# Altium PCB 555PCB.PcbDoc
Units mil, origin at the board's own origin, x right, y up, seen from the top; angles counter-clockwise.
Board outline 1795 x 845 mil, 2 copper layers (Top Layer, Bottom Layer); 12 components, 7 nets, 26 pads, 0 vias.
Unrouted connection lines stored in the file: 15.
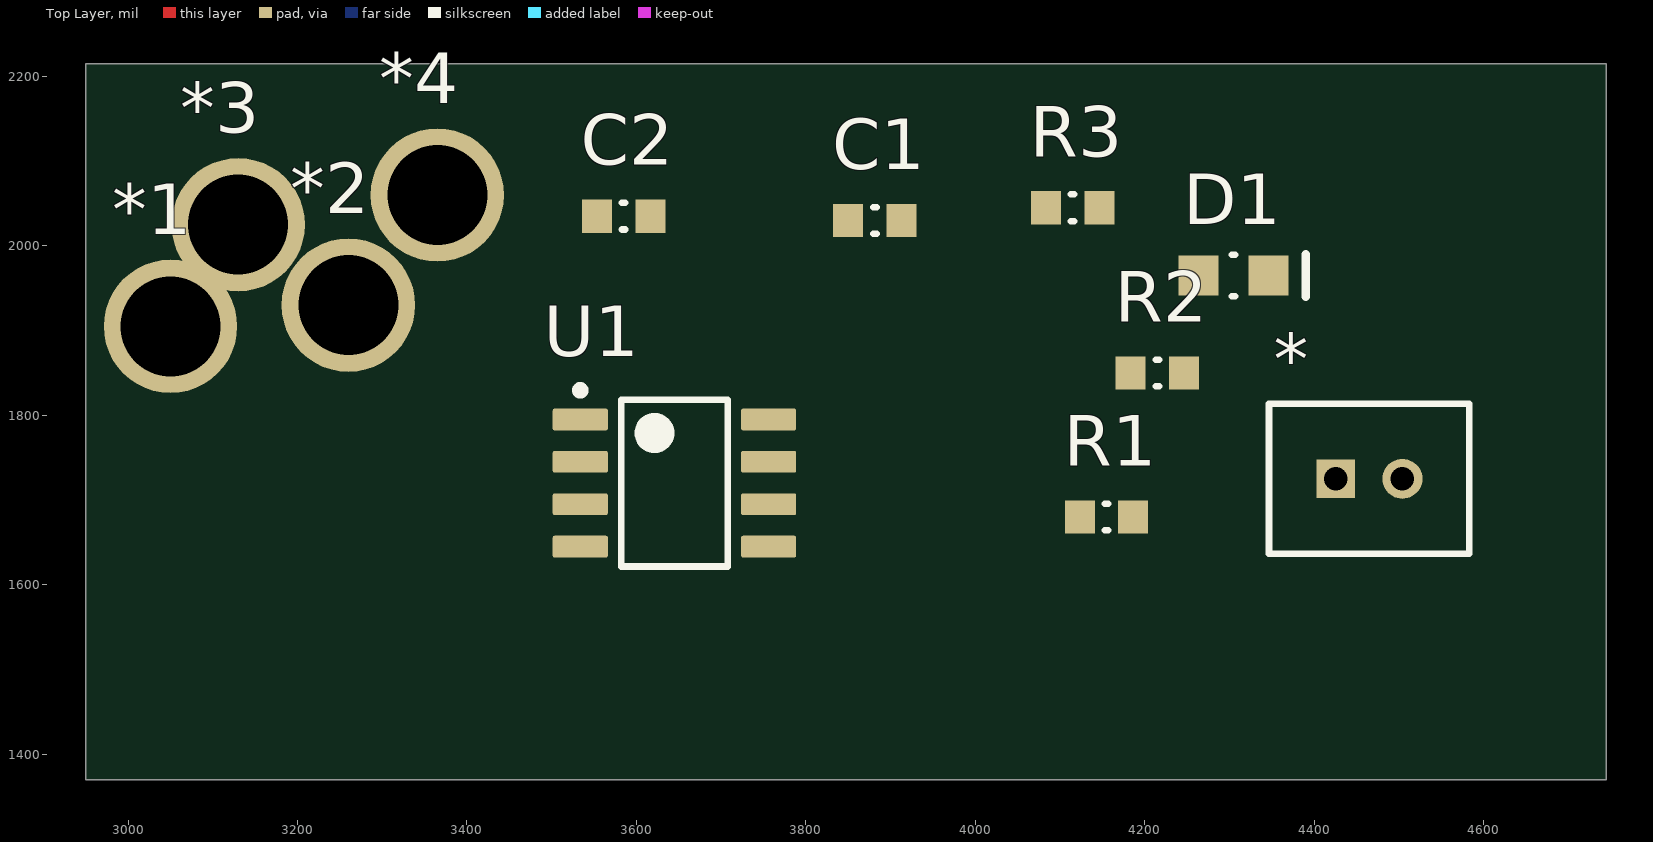
[diagram p0: Top Layer view]
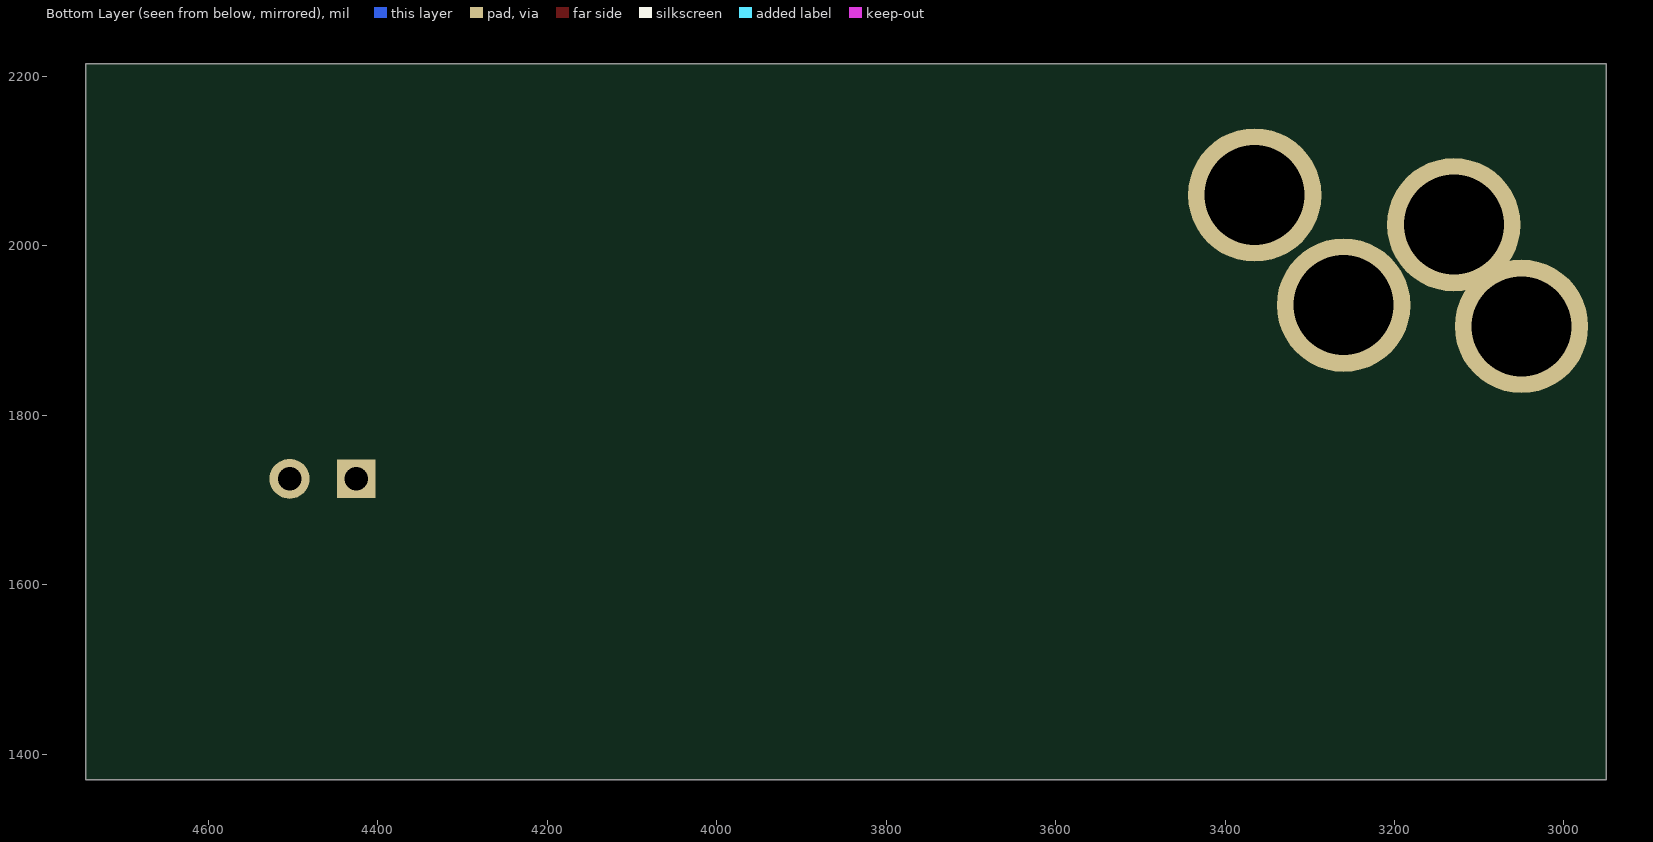
[diagram p1: Bottom Layer view, seen from below]

## Layer stack, top to bottom
Top Solder: solder mask 0.4, Solder Resist, Dk 3.5
Top Layer: signal copper 1.4
Dielectric 1: dielectric 12.6, FR-4, Dk 4.8
Bottom Layer: signal copper 1.4
Bottom Solder: solder mask 0.4, Solder Resist, Dk 3.5

## Board outline
2950,1370 4745,1370 4745,2215 2950,2215

## Design rules (kind name [scope] priority, off if disabled: settings)
Clearance [All] p1: gap=10 ignorepadtopadclearanceinfootprint=FALSE except(0: Arc-Hole Track-Hole SMDPad-Hole THPad-Hole Via-Hole Fill-Hole Poly-Hole Region-Hole Text-Hole)
PolygonConnect [All] p1: connectstyle=Relief reliefconductorwidth=10 reliefentries=4 polygonreliefangle="90 Angle" airgapwidth=10
RoutingVias [All] p1: holewidth=28 width=50 viastyle="Through Hole" minholewidth=28 minwidth=50 maxholewidth=28 maxwidth=50
SolderMaskExpansion [All] p1: expansion=4
Width [All] p1: maxlimit=10 minlimit=10 preferedwidth=10
30 further rules are at their usual default settings.

## Components (designator, comment, footprint, x,y, rotation, side; value= is the part's Value field where it differs from the comment)
* "CON_2M" JST-B2B-PHSK 4465,1725 r0 top
*1 "MOUNTING_HOLES" MOUNTING_HOLE 3050,1905 r0 top
*2 "MOUNTING_HOLES" MOUNTING_HOLE 3260,1930 r0 top
*3 "MOUNTING_HOLES" MOUNTING_HOLE 3130,2025 r0 top
*4 "MOUNTING_HOLES" MOUNTING_HOLE 3365,2060 r0 top
C1 "10uF" CAPC0603(1608)55_N 3881.5,2030 r0 top
C2 "CAP_10nF_0603" CAPC0603(1608)55_N 3585,2035 r0 top value=10nF
D1 "DIO_LED_R" LED_0805_LINE 4305,1965 r0 top
R1 "RES_1K_0603" RESC0603(1608)_N 4155,1680 r0 top value=1K
R2 "RES_10K_0603" RESC0603(1608)_N 4215,1850 r0 top value=10K
R3 "RES_1K_0603" RESC0603(1608)_N 4115,2045 r0 top value=1K
U1 "NE555D" 8-SOIC_M 3645,1720 r0 top

## Footprints (in the part's own frame and the unit in brackets; to place one, negate y for a bottom-side part, rotate by r counter-clockwise, add the part's x,y. Pads: shape width x height; smd on the part's side, far side on the other; paste and mask are expansions set on the pad)
8-SOIC_M [mm] "SOIC, 8-Leads, Body 5x4mm, Pitch 1.27mm, IPC Low Density"
  rrect15% 1.65x0.65 smd: 1(-2.825,1.905) 2(-2.825,0.635) 3(-2.825,-0.635) 4(-2.825,-1.905) 5(2.825,-1.905) 6(2.825,-0.635) 7(2.825,0.635) 8(2.825,1.905)
  silkscreen extent -2.95,-2.5 1.6,2.9, body extent -3,-2.45 3,2.45, height 1.63
CAPC0603(1608)55_N [mm] "Chip Capacitor, Body 1.6x0.8mm, Height 0.55mm, IPC Medium Density"
  rect 0.9x1 smd: 1(-0.8,0) 2(0.8,0)
  silkscreen extent -0.05,-0.4 0.05,0.4, body extent -0.87,-0.48 0.88,0.47, height 0.55
JST-B2B-PHSK [mm]
  rect 1.162x1.162 / inner rect 1.524x1.524 / far side rect 1.162x1.162 hole 0.7: 1(-1,0)
  round 1.2 / inner round 1.524 / far side round 1.2 hole 0.7: 2(1,0)
  silkscreen extent -3,-2.25 3,2.25
LED_0805_LINE [mm] "SMD, 2-Leads, Body 2x1.25mm"
  rect 1.2x1.2 smd: 1(-1.05,0) 2(1.05,0)
  silkscreen extent -0.05,-0.64 2.16,0.64, body extent -1,-0.63 1,0.63, height 0.8
MOUNTING_HOLE [mm]
  round 4 hole 3 unplated: 0(0,0)
RESC0603(1608)_N [mm] "Chip Resistor, Body 1.6x0.8mm, IPC Medium Density"
  rect 0.9x1 smd: 1(-0.8,0) 2(0.8,0)
  silkscreen extent -0.05,-0.4 0.05,0.4, body extent -0.85,-0.47 0.85,0.47, height 0.6

## Part data
*1 *2 *3 *4: "6cm x 6cm"
C1: library part CAP_10uF_0603, "CAP CER 10UF 10V X5R 0603", Digikey Part Number=311-1817-1-ND, Manufacturer=Yageo, MPN=CC0603MRX5R6BB106, Package="0603 (1608 Metric)", Voltage Rating=10V, Dimensions="0.063\" L x 0.031\" W (1.60mm x 0.80mm)"
C2: "CAP CER 10000PF 16V X7R 0603", Digikey Part Number=311-3369-1-ND, Manufacturer=Yageo, MPN=CC0603KRX7R7BB103, Package="0603 (1608 Metric)", Temperature Coefficient=X7R, Voltage Rating=16V, Dimensions="0.063\" L x 0.031\" W (1.60mm x 0.80mm)"
D1: "LED RED DIFFUSED 0805 SMD", Digikey Part Number=475-1278-1-ND, Forward Voltage Drop=2V, Manufacturer=OSRAM, MPN="LS R976-NR-1", Package="0805 (2012 Metric)"
R1 R3: "RES SMD 1K OHM 5% 1/10W 0603", Digikey Part Number=311-1.0KGRCT-ND, Manufacturer=Yageo, MPN=RC0603JR-071KL, Package="0603 (1608 Metric)", Tolerance=5%, Dimensions="0.063\" L x 0.031\" W (1.60mm x 0.80mm)"
R2: "RES SMD 10K OHM 5% 1/10W 0603", Digikey Part Number=311-10KGRCT-ND, Manufacturer=Yageo, MPN=RC0603JR-0710KL, Package="0603 (1608 Metric)", Tolerance=5%, Dimensions="0.063\" L x 0.031\" W (1.60mm x 0.80mm)"
U1: "Precision Timer, 4.5 to 16 V, 0 to 70 degC, 8-Pin SOIC (D), Green (RoHS & no Sb/Br), Tube", Digital IC Case Style=SOIC, Frequency=500kHz, IC Temperature Range=Commercial, Manufacturer="Texas Instruments", Operating Frequency Max=0.5MHz, Operating Mode=Astable,Monostable, Operating Temperature Max=70°C, Operating Temperature Min=0°C, Operating Temperature Range=0°Cto+70°C, Package Description="8-Pin Small Outline Integrated Circuit, Body 4.9 x 3.9 mm, Pitch 1.27 mm", Package Reference=D8, PartNumber=NE555, Supply Voltage Max=16V, Supply Voltage Min=4.5V, Supply Voltage Range=4.5Vto16V, Base Number=555, Clock External Input=No, Datasheet URL=http://www.ti.com/general/docs/lit/getliterature.tsp?genericPartNumber=NE555&fileType=pdf, Datasheet Version="Rev. I, 09/2014", Device Marking=NE555D, IC Generic Number=555, Logic Function Number=555, Manufacturer URL=http://www.ti.com/, Mounting Technology=SurfaceMount, No. of Channels=1, No. of Pins=8, No. of Timers=1, Package / Case=SOIC, Package URL=http://www.ti.com/lit/ml/msoi002j/msoi002j.pdf, SVHC=NoSVHC(19-Dec-2012)

## Nets (pads, with @x,y where several pads share a name; then routed paths per layer and width w, separated by ;. In a path a pad name is that pad's centre, name@x,y a point inside that pad or via, vN(x,y) a via of type N, cw(c..) or ccw(c..) an arc to the next point about the centre after c; other vN are vias at no path point)
+9: *.1 R3.2 U1.4 U1.8
CONT: C2.2 U1.5
DISCH: R2.2 R3.1 U1.7
GND: *.2 C1.1 C2.1 D1.2 U1.1
NetD1_1: D1.1 R1.2
OUTRES: R1.1 U1.3
TRIG: C1.2 R2.1 U1.2 U1.6
pads on no net: *1.0 *2.0 *3.0 *4.0

## Polygon pours and split planes (outlines as drawn)
no net on Top Layer "Top Layer-No Net 1" (solid, pour order 1): 3860,1835